# Altium PCB PCB1.PcbDoc
Units mm, origin at the board's own origin, x right, y up, seen from the top; angles counter-clockwise.
Board outline 182 x 74 mm, 2 copper layers (Top Layer, Bottom Layer), stack 1.671 mm thick; 40 components, 90 nets, 296 pads, 0 vias.
Unrouted connection lines stored in the file: 184.
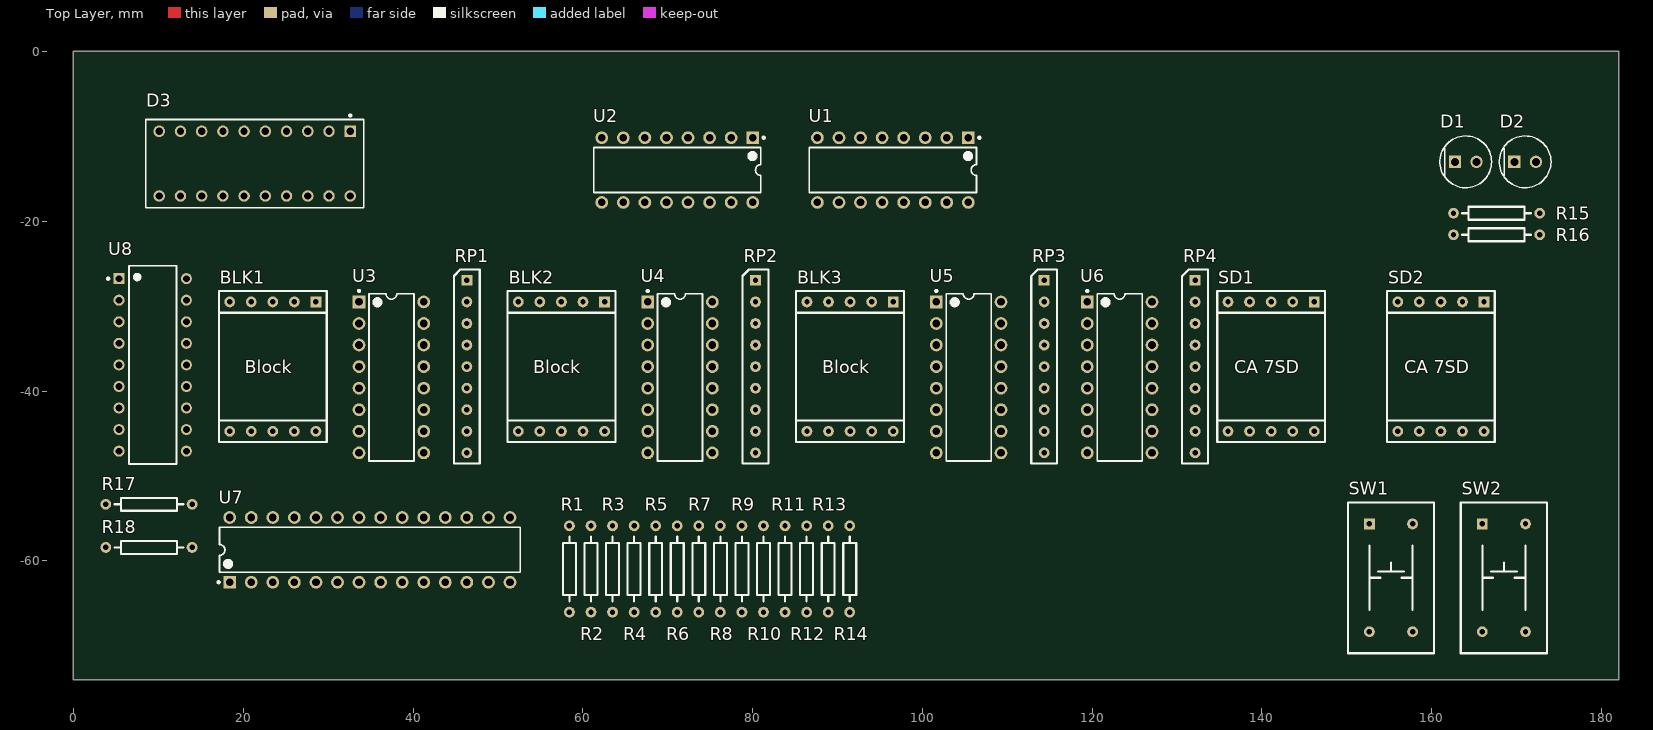
[diagram p0: Top Layer view]
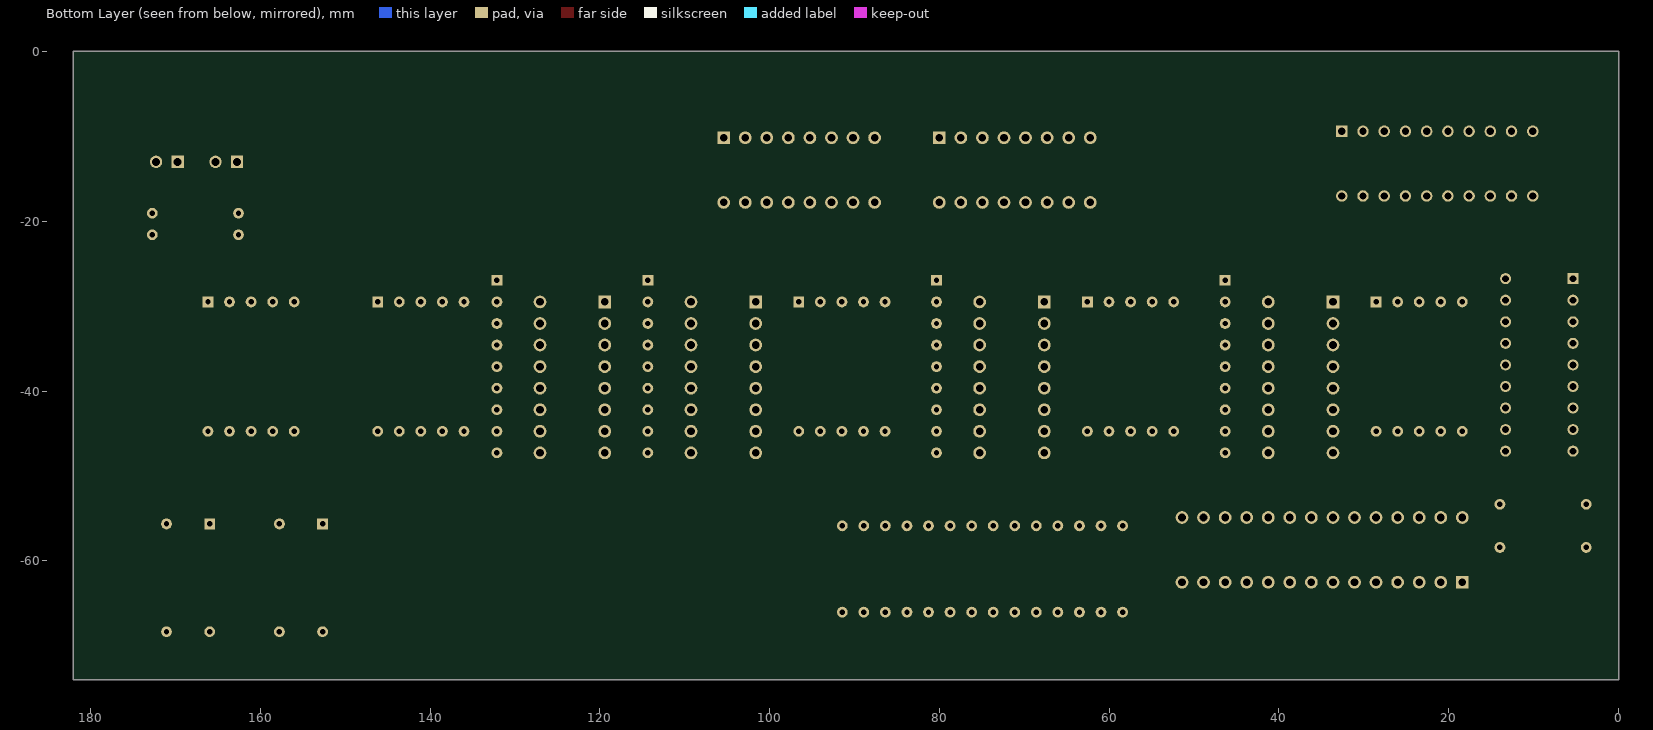
[diagram p1: Bottom Layer view, seen from below]

## Layer stack, top to bottom
Top Solder: solder mask 0.0102, Solder Resist, Dk 3.5
Top Layer: signal copper 0.0356
Dielectric 1: dielectric 1.6, FR-4, Dk 4.8
Bottom Layer: signal copper 0.0356
Bottom Solder: solder mask 0.0102, Solder Resist, Dk 3.5

## Board outline
0,0 182,0 182,-74 0,-74

## Design rules (kind name [scope] priority, off if disabled: settings)
Clearance [All] p1: gap=0.3 ignorepadtopadclearanceinfootprint=FALSE
PolygonConnect [All] p1: connectstyle=Relief reliefconductorwidth=0.254 reliefentries=4 polygonreliefangle="90 Angle" airgapwidth=0.254
RoutingVias [All] p1: holewidth=0.3 width=0.6 viastyle="Through Hole" minholewidth=0.3 minwidth=0.6 maxholewidth=0.3 maxwidth=0.6
SolderMaskExpansion [All] p1: expansion=0.102 istentingtop=FALSE
Width [All] p1: maxlimit=1 minlimit=0.3 preferedwidth=0.5
30 further rules are at their usual default settings.

## Components (designator, comment, footprint, x,y, rotation, side; value= is the part's Value field where it differs from the comment)
BLK1 "6x5 Block" Block_6x5 23.48,-29.5 r0 top
BLK2 "6x5 Block" Block_6x5 57.48,-29.5 r0 top
BLK3 "6x5 Block" Block_6x5 91.48,-29.5 r0 top
D1 "HLMP-4700" FP-HLMP-4700-MFG 164,-13 r0 top
D2 "HLMP-4700" FP-HLMP-4700-MFG 171,-13 r0 top
D3 "SSA-LXB10HW-GF/LP" FP-SSA-LXB10HW-GF-LP-MFG 21.35,-13.21 r270 top
R1 "220R" CFR_400mil 58.42,-55.88 r270 top
R2 "220R" CFR_400mil 60.96,-66.04 r90 top
R3 "220R" CFR_400mil 63.5,-55.88 r270 top
R4 "220R" CFR_400mil 66.04,-66.04 r90 top
R5 "220R" CFR_400mil 68.58,-55.88 r270 top
R6 "220R" CFR_400mil 71.12,-66.04 r90 top
R7 "220R" CFR_400mil 73.66,-55.88 r270 top
R8 "220R" CFR_400mil 76.2,-66.04 r90 top
R9 "220R" CFR_400mil 78.74,-66.04 r90 top
R10 "220R" CFR_400mil 81.28,-66.04 r90 top
R11 "220R" CFR_400mil 83.82,-66.04 r90 top
R12 "220R" CFR_400mil 86.36,-66.04 r90 top
R13 "220R" CFR_400mil 88.9,-55.88 r270 top
R14 "220R" CFR_400mil 91.44,-66.04 r90 top
R15 "220R" CFR_400mil 162.56,-19.05 r0 top
R16 "220R" CFR_400mil 162.56,-21.59 r0 top
R17 "3K3" CFR_400mil 13.97,-53.34 r180 top
R18 "2K2" CFR_400mil 13.97,-58.42 r180 top
RP1 "Resistor Pack 1k x 8" "Resistor Pack 1k x 8" 46.34,-26.96 r0 top
RP2 "Resistor Pack 1k x 8" "Resistor Pack 1k x 8" 80.34,-26.96 r0 top
RP3 "Resistor Pack 1k x 8" "Resistor Pack 1k x 8" 114.34,-26.96 r0 top
RP4 "Resistor Pack 1k x 8" "Resistor Pack 1k x 8" 132.12,-26.96 r0 top
SD1 "CA 7SD" "CA 7SD" 141.08,-29.5 r0 top
SD2 "CA 7SD" "CA 7SD" 161.08,-29.5 r0 top
SW1 "SPST (KRS-1273B-R)" "SPST KRS-1273B-R" 152.66,-55.65 r0 top
SW2 "SPST (KRS-1273B-R)" "SPST KRS-1273B-R" 165.96,-55.65 r0 top
U1 "SN74LS47N" N0016A 96.52,-13.97 r270 top
U2 "SN74LS47N" N0016A 71.12,-13.97 r270 top
U3 "SN74LS165AN" N0016A 37.45,-38.39 r0 top
U4 "SN74LS165AN" N0016A 71.45,-38.39 r0 top
U5 "SN74LS165AN" N0016A 105.45,-38.39 r0 top
U6 "SN74HC595N" N0016A 123.23,-38.39 r0 top
U7 "ATmega328P-PU" 28P3 34.91,-58.71 r90 top
U8 "LM3914N-1" FP-NFK0018A-MFG 9.331,-36.92 r0 top

## Footprints (in the part's own frame and the unit in brackets; to place one, negate y for a bottom-side part, rotate by r counter-clockwise, add the part's x,y. Pads: shape width x height; smd on the part's side, far side on the other; paste and mask are expansions set on the pad)
28P3 [mm] "28-Pin Plastic Dual In-Line Package (PDIP)"
  rect 1.5x1.5 hole 0.9: 1(-3.81,16.51)
  round 1.5 hole 0.9: 2(-3.81,13.97) 3(-3.81,11.43) 4(-3.81,8.89) 5(-3.81,6.35) 6(-3.81,3.81) 7(-3.81,1.27) 8(-3.81,-1.27) 9(-3.81,-3.81) 10(-3.81,-6.35) 11(-3.81,-8.89) 12(-3.81,-11.43) 13(-3.81,-13.97) 14(-3.81,-16.51) 15(3.81,-16.51) 16(3.81,-13.97) 17(3.81,-11.43) 18(3.81,-8.89) 19(3.81,-6.35) 20(3.81,-3.81) 21(3.81,-1.27) 22(3.81,1.27) 23(3.81,3.81) 24(3.81,6.35) 25(3.81,8.89) 26(3.81,11.43) 27(3.81,13.97) 28(3.81,16.51)
  silkscreen extent -3.93,-17.7 2.65,17.93, body extent -3.6,-17.65 3.6,17.65, height 4.58
Block_6x5 [mil]
  rect 50x50 hole 25: 1(200,0)
  round 50 hole 25: 2(100,0) 3(0,0) 4(-100,0) 5(-200,0) 6(-200,-600) 7(-100,-600) 8(0,-600) 9(100,-600) 10(200,-600)
  silkscreen extent -250,-650 250,50
"CA 7SD" [mil]
  rect 50x50 hole 25: 1(200,0)
  round 50 hole 25: 2(100,0) 3(0,0) 4(-100,0) 5(-200,0) 6(-200,-600) 7(-100,-600) 8(0,-600) 9(100,-600) 10(200,-600)
  silkscreen extent -250,-650 250,50
CFR_400mil [mil]
  round 50 hole 25: 1(0,0) 2(400,0)
  silkscreen extent 50,-30 350,30
FP-HLMP-4700-MFG [mm]
  rect 1.45x1.45 hole 0.95 paste-1000 mask+0: 1(-1.27,0)
  round 1.45 hole 0.95 paste-1000 mask+0: 2(1.27,0)
  silkscreen extent -3.05,-3.05 3.05,3.05, body extent -3.15,-3.15 3.15,3.15, height 0.25
FP-NFK0018A-MFG [mm]
  rect 1.3x1.3 hole 0.8 paste-1000 mask+0: 1(-3.969,10.16)
  round 1.3 hole 0.8 paste-1000 mask+0: 2(-3.969,7.62) 3(-3.969,5.08) 4(-3.969,2.54) 5(-3.969,0) 6(-3.969,-2.54) 7(-3.969,-5.08) 8(-3.969,-7.62) 9(-3.969,-10.16) 10(3.969,-10.16) 11(3.969,-7.62) 12(3.969,-5.08) 13(3.969,-2.54) 14(3.969,0) 15(3.969,2.54) 16(3.969,5.08) 17(3.969,7.62) 18(3.969,10.16)
  silkscreen extent -5.37,-11.68 2.8,11.68, body extent -4.72,-12.04 4.72,12.04, height 0.25
FP-SSA-LXB10HW-GF-LP-MFG [mm]
  rect 1.35x1.35 hole 0.85 paste-1000 mask+0: 1(-3.81,11.25)
  round 1.35 hole 0.85 paste-1000 mask+0: 2(-3.81,8.75) 3(-3.81,6.25) 4(-3.81,3.75) 5(-3.81,1.25) 6(-3.81,-1.25) 7(-3.81,-3.75) 8(-3.81,-6.25) 9(-3.81,-8.75) 10(-3.81,-11.25) 11(3.81,-11.25) 12(3.81,-8.75) 13(3.81,-6.25) 14(3.81,-3.75) 15(3.81,-1.25) 16(3.81,1.25) 17(3.81,3.75) 18(3.81,6.25) 19(3.81,8.75) 20(3.81,11.25)
  silkscreen extent -5.8,-12.82 5.21,12.82, body extent -5.31,-12.93 5.31,12.93, height 0.25
N0016A [mm] "DIP, 16-Leads, Body 19.7x6.6mm, Pitch 2.54mm"
  rect 1.5x1.5 hole 0.9: 1(-3.81,8.89)
  round 1.5 hole 0.9: 2(-3.81,6.35) 3(-3.81,3.81) 4(-3.81,1.27) 5(-3.81,-1.27) 6(-3.81,-3.81) 7(-3.81,-6.35) 8(-3.81,-8.89) 9(3.81,-8.89) 10(3.81,-6.35) 11(3.81,-3.81) 12(3.81,-1.27) 13(3.81,1.27) 14(3.81,3.81) 15(3.81,6.35) 16(3.81,8.89)
  silkscreen extent -3.93,-9.85 2.65,10.32, body extent -3.95,-9.85 3.95,9.85, height 5.08
"Resistor Pack 1k x 8" [mil]
  rect 50x50 hole 25: 1(0,0)
  round 50 hole 25: 2(0,-100) 3(0,-200) 4(0,-300) 5(0,-400) 6(0,-500) 7(0,-600) 8(0,-700) 9(0,-800)
  silkscreen extent -60,-850 60,50
"SPST KRS-1273B-R" [mm]
  rect 1.27x1.27 hole 0.635: 1(0,0)
  round 1.27 hole 0.635: 2(0,-12.7) 3(5.08,-12.7) 4(5.08,0)
  silkscreen extent -2.54,-15.24 7.62,2.54

## Part data
BLK1 BLK2 BLK3: library part Block_6x5
D1 D2: library part CMP-18399-000008-1, "LED RED DIFFUSED T-1 3/4 T/H", Colour=Red, Forward Current=2mA, Forward Voltage=1.7V, Manufacturer=Broadcom, Power Dissipation=14mW, Reverse Voltage=5V, Temperature="-40°C to +100°C", Temperature Range High=+100°C, Temperature Range Low=-40°C, Automotive=No, Category=Diode, ComponentLink2Description=Datasheet, ComponentLink2URL=https://docs.broadcom.com/docs/AV02-1557EN, Device Class L1=Optoelectronics, Device Class L2=LEDs, Device Class L3=unset, Digikey Description="LED RED DIFFUSED T-1 3/4 T/H", Lead Free=Yes, Led Orientation=Straight, Luminous Intensity=2.3mcd, Manufacturer Part Number=HLMP-4700, Mouser Description="LED; Red; 2.3mcd; 0.24In.Dia.; T-1-3/4; 500mA; 1.7V; 635nm; 50deg; 5V; 24mW; -55degC;", Octopart=https://octopart.com/hlmp-4700-broadcom-71130526, Package=HLMP-4700, Peak Emmision Wavelength=635nm, RoHS=TRUE, Viewing Angle=50°, Wavelength=626nm
D3: library part CMP-57188-000001-1, "LED ARRAY 10X25MM 10SEG RED DIFF", Forward Current=20mA, Forward Voltage=2V, Manufacturer=lumex, Power Dissipation=105mW, Reverse Voltage=5V, Temperature="-40°C to +85°C", Temperature Range High=+85°C, Temperature Range Low=-40°C, Automotive=No, Category=Diode, ComponentLink2Description=Datasheet, ComponentLink2URL=https://www.lumex.com/spec/SSA-LXB10HW-GF-LP.pdf, Device Class L1=Optoelectronics, Device Class L2=Displays, Device Class L3="LED Displays", Digikey Description="LED ARRAY 10X25MM 10SEG RED DIFF", Display Type="Bar Graph", Height=7.05mm, Lead Free=Yes, Luminous Intensity=500mcd, Manufacturer Part Number=SSA-LXB10HW-GF/LP, Mouser Description="LED Bars and Arrays 10 Segment Red", Octopart=https://octopart.com/ssa-lxb10hw-gf%2Flp-lumex-548235, Package=SSA-LXB10HW-GF/LP, RoHS=TRUE, Test Current=20mA, Viewing Angle=160°
R1 R2 R3 R4 R5 R6 R7 R8 R9 R10 R11 R12 R13 R14 R15 R16: library part CFR-25JB-52-220R, "General Type Carbon Film Resistor 220Ohm 1/4W 5% Axial Bulk", Case/Package=Axial, Manufacturer=Yageo, Max Operating Temperature=155°C, Max Power Dissipation=250mW, Min Operating Temperature=-55°C, Package Quantity=200, Resistor Type="Carbon Film", Supplier Part Number 1=220QBK-ND, Temperature Coefficient=500ppm/°C, Tolerance=5%, Category="Through-Hole Resistors", ComponentLink1Description=http://www.mouser.com/ds/2/447/Yageo%20LR_CFR_2013-540723.pdf?src-supplier=Mouser, ComponentLink1URL=http://www.mouser.com/ds/2/447/Yageo%20LR_CFR_2013-540723.pdf?src-supplier=Mouser, ComponentLink2Description=http://www.yageo.com/NewPortal/yageodocoutput?fileName=/pdf/throughhole/Yageo_LR_CFR_2013.pdf&src-supplier=Digi-Key, ComponentLink2URL=http://www.yageo.com/NewPortal/yageodocoutput?fileName=/pdf/throughhole/Yageo_LR_CFR_2013.pdf&src-supplier=Digi-Key, Length=0.248inch, Manufacturer Part Number=CFR-25JB-52-220R, Number of Terminations=2, Packaging=Bulk, Pricing 1="1=0.10000, 10=0.06800, 25=0.04680, 50=0.03640, 100=0.02600, 250=0.02028, 500=0.01612, 1000=0.01144, 5000=0.00884 (USD)", Resistance=220R, RoHS=Yes, RoHS Compliant=Yes, Series="Carbon Film", Stock 1=1583, Supplier 1=Digi-Key
R17: library part CFR-25JB-52-3K3, "General Type Carbon Film Resistor 3.3kOhm 1/4W 5% Axial Bulk", Case/Package=Axial, Manufacturer=Yageo, Manufacturer Part Number=CFR-25JB-52-220R, Max Operating Temperature=155°C, Max Power Dissipation=250mW, Min Operating Temperature=-55°C, Package Quantity=200, Resistance=220R, Resistor Type="Carbon Film", Supplier Part Number 1=220QBK-ND, Temperature Coefficient=500ppm/°C, Tolerance=5%, Category="Through-Hole Resistors", ComponentLink1Description=http://www.mouser.com/ds/2/447/Yageo%20LR_CFR_2013-540723.pdf?src-supplier=Mouser, ComponentLink1URL=http://www.mouser.com/ds/2/447/Yageo%20LR_CFR_2013-540723.pdf?src-supplier=Mouser, ComponentLink2Description=http://www.yageo.com/NewPortal/yageodocoutput?fileName=/pdf/throughhole/Yageo_LR_CFR_2013.pdf&src-supplier=Digi-Key, ComponentLink2URL=http://www.yageo.com/NewPortal/yageodocoutput?fileName=/pdf/throughhole/Yageo_LR_CFR_2013.pdf&src-supplier=Digi-Key, Length=0.248inch, Number of Terminations=2, Packaging=Bulk, Pricing 1="1=0.10000, 10=0.06800, 25=0.04680, 50=0.03640, 100=0.02600, 250=0.02028, 500=0.01612, 1000=0.01144, 5000=0.00884 (USD)", RoHS=Yes, RoHS Compliant=Yes, Series="Carbon Film", Stock 1=1583, Supplier 1=Digi-Key
R18: library part CFR-25JB-52-2K2, "General Type Carbon Film Resistor 2.2kOhm 1/4W 5% Axial Bulk", Case/Package=Axial, Manufacturer=Yageo, Manufacturer Part Number=CFR-25JB-52-220R, Max Operating Temperature=155°C, Max Power Dissipation=250mW, Min Operating Temperature=-55°C, Package Quantity=200, Resistance=220R, Resistor Type="Carbon Film", Supplier Part Number 1=220QBK-ND, Temperature Coefficient=500ppm/°C, Tolerance=5%, Category="Through-Hole Resistors", ComponentLink1Description=http://www.mouser.com/ds/2/447/Yageo%20LR_CFR_2013-540723.pdf?src-supplier=Mouser, ComponentLink1URL=http://www.mouser.com/ds/2/447/Yageo%20LR_CFR_2013-540723.pdf?src-supplier=Mouser, ComponentLink2Description=http://www.yageo.com/NewPortal/yageodocoutput?fileName=/pdf/throughhole/Yageo_LR_CFR_2013.pdf&src-supplier=Digi-Key, ComponentLink2URL=http://www.yageo.com/NewPortal/yageodocoutput?fileName=/pdf/throughhole/Yageo_LR_CFR_2013.pdf&src-supplier=Digi-Key, Length=0.248inch, Number of Terminations=2, Packaging=Bulk, Pricing 1="1=0.10000, 10=0.06800, 25=0.04680, 50=0.03640, 100=0.02600, 250=0.02028, 500=0.01612, 1000=0.01144, 5000=0.00884 (USD)", RoHS=Yes, RoHS Compliant=Yes, Series="Carbon Film", Stock 1=1583, Supplier 1=Digi-Key
RP1 RP2 RP3 RP4: library part 4309R-101-102LF, "Res Thick Film NET 1K Ohm 2% 1.13W ±100ppm/°C BUS Molded 9-Pin SIP Pin Thru-Hole", Case/Package=SIP, Manufacturer=Bourns, Max Operating Temperature=125°C, Min Operating Temperature=-55°C, Number of Resistors=8, Package Quantity=22, Power Per Element=200mW, Power Rating=1.13W, Resistance=1kR, Resistance Tolerance=2%, Supplier Part Number 1=32K9075, Temperature Coefficient=100ppm/°C, Voltage Rating=100V, Category="Resistor Arrays", Circuit Type=Bussed, ComponentLink1Description=https://datasheet.ciiva.com/1132/1639105-1132861.pdf?src-supplier=Element14, ComponentLink1URL=https://datasheet.ciiva.com/1132/1639105-1132861.pdf?src-supplier=Element14, ComponentLink2Description=https://datasheet.ciiva.com/3264/4300r-3264093.pdf?src-supplier=Avnet, ComponentLink2URL=https://datasheet.ciiva.com/3264/4300r-3264093.pdf?src-supplier=Avnet, ComponentLink3Description=https://datasheet.ciiva.com/6494/4300r-6494366.pdf?src-supplier=Digi-Key, ComponentLink3URL=https://datasheet.ciiva.com/6494/4300r-6494366.pdf?src-supplier=Digi-Key, ComponentLink4Description=https://datasheet.ciiva.com/14583/70154247-14583487.pdf?src-supplier=Allied+Electronics, ComponentLink4URL=https://datasheet.ciiva.com/14583/70154247-14583487.pdf?src-supplier=Allied+Electronics, Depth=2.16mm, Height=0.195inch, Lead Pitch=2.54mm, Length=0.884inch, Manufacturer Part Number=4309R-101-102LF, Military Standard=Not, Mount="Through Hole", Number of Elements=8, Number of Pins=9, Number of Terminals/Pins=9, Packaging=Rail/Tube, Pricing 1="1=1.42000 (USD)", Radiation Hardening=No, Reach SVHC Compliant=Yes, RoHS=Yes, RoHS Compliant=Yes, Series=4300R, Stock 1=21, Supplier 1=Avnet, Technology="THICK FILM", Terminal Pitch=2.54mm, Termination=SIP, Tolerance=2%, Voltage Rating (DC)=100V, Width=0.085inch
SD1 SD2: library part LDS-A5642RI, "Single Digit Seven Segment Green 0.56\" Common Anode Through Hole LED Display", Case/Package=DIP, Color=Green, Forward Current=10mA, Forward Voltage=2.2V, Manufacturer=Lumex, Max Operating Temperature=85°C, Max Power Dissipation=105mW, Min Operating Temperature=-40°C, Package Quantity=40, Supplier Part Number 1=8628562, Category="LED Displays", ComponentLink1Description=https://datasheet.ciiva.com/16294/lds-a5642ri-16294404.pdf?src-supplier=Future+Electronics, ComponentLink1URL=https://datasheet.ciiva.com/16294/lds-a5642ri-16294404.pdf?src-supplier=Future+Electronics, ComponentLink2Description=https://datasheet.ciiva.com/4421/lds-a5642ri-33718-4421941.pdf?src-supplier=Mouser, ComponentLink2URL=https://datasheet.ciiva.com/4421/lds-a5642ri-33718-4421941.pdf?src-supplier=Mouser, ComponentLink3Description=https://datasheet.ciiva.com/30079/lds-a5642ri-30079851.pdf?src-supplier=Onlinecomponents.com, ComponentLink3URL=https://datasheet.ciiva.com/30079/lds-a5642ri-30079851.pdf?src-supplier=Onlinecomponents.com, Display Type=Segment, Element Configuration="Common Anode", Height=0.32inch, Illumination Color=Green, Lead Free="Lead Free", Length=0.67inch, Luminous Intensity=3.9mcd, Manufacturer Part Number=LDS-A5642RI, Mount="Through Hole", Number of Contacts=10, Number of LEDs=8, Number of Pins=10, Operating Supply Voltage=2.2V, Packaging=Bulk, Power Consumption=105mW, Pricing 1="1=0.91500, 50=0.88000, 200=0.84000, 750=0.80500, 2500=0.74000 (USD)", RoHS=Yes, RoHS Compliant=Yes, Supplier 1="Future Electronics", Test Current=10mA, Viewing Area (height)=14.2mm, Wavelength=565nm, Width=0.5inch
SW1 SW2: library part KRS-1273B-R, "Switch Push Button Tactile Off Momentary (On) Single Pole Single Throw Cap: 155389 155409", Manufacturer="Jameco Valuepro", Supplier Part Number 1=155380, Category=Uncategorized, ComponentLink1Description=https://datasheet.ciiva.com/19453/155380-19453382.pdf?src-supplier=Jameco, ComponentLink1URL=https://datasheet.ciiva.com/19453/155380-19453382.pdf?src-supplier=Jameco, Manufacturer Part Number=KRS-1273B-R, Number of Pins=4, Orientation=Straight, Pricing 1="1=0.45000, 10=0.39000, 100=0.35000, 250=0.29000 (USD)", RoHS=No, Stock 1=2143, Supplier 1=Jameco, Termination="PC Pins", Throw Configuration=SPST
U1 U2: library part CMP-0388-00303-2, "BCD-to-7-Segment Decoder / Driver, 4.75 to 5.25 V, 0 to 70 degC, 16-pin DIP (N16), Pb-Free (RoHS)", Manufacturer="Texas Instruments", Rating=Catalog, Code_JEDEC=MS-001, ComponentLink1Description="Manufacturer URL", ComponentLink1URL=http://www.ti.com/, ComponentLink2Description=Datasheet, ComponentLink2URL=http://www.ti.com/general/docs/lit/getliterature.tsp?genericPartNumber=SN74LS47&fileType=pdf, ComponentLink3Description="Package Specification", ComponentLink3URL=http://www.ti.com/litv/pdf/mpdi002c, DatasheetVersion=SDLS111, Eco-Plan="Pb-Free (RoHS)", Mounting Technology="Through Hole", PackageDescription="16-Pin Plastic In-Line, Body 19.305 x 6.35 mm, Pitch 2.54 mm", PackageReference=N0016A, PackageVersion=4040049/E, PartNumber=SN74LS47N, SubFamily="Discrete Segment LED Driver", Vin(Max)(V)=5.25, Vin(Min)(V)=4.75
U3 U4 U5: library part CMP-0780-00134-3, "Serial-out shift registers, N0016A, TUBE", F @ Nom Voltage(Max)(Mhz)=35, Generic Part Number=SN74LS165A, ICC @ Nom Voltage(Max)(mA)=30, Manufacturer="Texas Instruments", Operating Temperature Range(C)="0 to 70", Rating=Catalog, tpd @ Nom Voltage(Max)(ns)=25, Voltage(Nom)(V)=5, 3-State Output=No, Bits=8, Code_JEDEC=MS-001, DatasheetVersion=SDLS062D, Input Type=TTL, Output Drive (IOL/IOH)(Max)(mA)=8/-0.4, Output Type=TTL, PackageReference=N0016A, PackageVersion=http://www.ti.com/lit/ml/mpdi002c/mpdi002c.pdf, Technology Family=LS, VCC(Max)(V)=5.25, VCC(Min)(V)=4.75
U6: library part CMP-0780-00137-3, "8-Bit Shift Registers With 3-State Output Registers, N0016A, TUBE", F @ Nom Voltage(Max)(Mhz)=28, Generic Part Number=SN74HC595, ICC @ Nom Voltage(Max)(mA)=0.08, Manufacturer="Texas Instruments", Operating Temperature Range(C)="-40 to 85", Rating=Military, tpd @ Nom Voltage(Max)(ns)=34, Voltage(Nom)(V)=6, 3-State Output=Yes, Bits=8, Code_JEDEC=MS-001, DatasheetVersion=SCLS041H, Input Type=CMOS, Output Drive (IOL/IOH)(Max)(mA)=7.8/-7.8, Output Type=CMOS, PackageReference=N0016A, PackageVersion=http://www.ti.com/lit/ml/mpdi002c/mpdi002c.pdf, Technology Family=HC, VCC(Max)(V)=6, VCC(Min)(V)=2
U7: library part CMP-0095-00013-2, "8-bit AVR Microcontroller, 32KB Flash, 1KB EEPROM, 2KB SRAM, 28-pin PDIP, Industrial Grade (-40°C to 85°C)", ComponentLink1Description="Manufacturer URL", ComponentLink1URL=http://www.atmel.com/, ComponentLink2Description="ATmega48A/48PA/88A/88PA/168A/168PA/328/328P Datasheet", ComponentLink2URL=http://www.atmel.com/dyn/resources/prod_documents/8271.pdf, ComponentLink3Description="ATmega48A/48PA/88A/88PA/168A/168PA/328/328P Summary", ComponentLink3URL=http://www.atmel.com/dyn/resources/prod_documents/8271S.pdf, DatasheetVersion="revD, May-2011", PackageDescription="28-lead (0.300\"/7.62mm Wide) Plastic Dual Inline Package (PDIP)", PackageReference=28P3, PackageVersion="revB, Sep-2001", RevisionNote="DatasheetVersion updated. URLs added."
U8: library part CMP-0058-00006-4, "IC DRVR DOT/BAR DISPLAY 18DIP", Case/Package=DIP, Max Input Voltage=12V, Max Operating Temperature=70°C, Max Output Voltage=1.34V, Max Power Dissipation=1.365W, Max Supply Current=9.2kA, Max Supply Voltage=25V, Min Input Voltage=1.2V, Min Operating Temperature=0°C, Nominal Supply Current=9.2mA, Operating Supply Current=6.1mA, Output Current=30mA, Output Voltage=1.28V, Package Quantity=20, Height=3.3mm, Lead Free="Contains Lead", Length=22.86mm, Mount="Through Hole", Number of Channels=10, Number of Outputs=10, Number of Pins=18, Number of Segments=10, Packaging=Rail/Tube, Power Dissipation=1.365W, Radiation Hardening=No, REACH SVHC="No SVHC", RoHS Compliant=No, Series=-, Supply Current=9.2mA, Termination="Through Hole", Width=6.35mm

## Nets (pads, with @x,y where several pads share a name; then routed paths per layer and width w, separated by ;. In a path a pad name is that pad's centre, name@x,y a point inside that pad or via, vN(x,y) a via of type N, cw(c..) or ccw(c..) an arc to the next point about the centre after c; other vN are vias at no path point)
GND: BLK1.10 BLK2.10 BLK3.10 R15.2 R16.2 R17.2 RP1.1 RP2.1 RP3.1 RP4.1 SW1.3 SW2.3 U1.8 U2.8 U3.8 U3.10 U4.8 U4.10 U5.8 U5.10 U6.8 U6.13 U7.8 U7.22 U8.2 U8.4
IO6: U1.4 U2.4
IO11: U3.7 U7.17
NetBLK1_1: BLK1.1 RP1.6 U3.3 | length 0.1
  Top Layer w0.5: BLK1.1 BLK1.1@28.6,-29.54
NetBLK1_2: BLK1.2 RP1.7 U3.4
NetBLK1_3: BLK1.3 RP1.8 U3.5
NetBLK1_4: BLK1.4 RP1.9 U3.6
NetBLK1_6: BLK1.6 RP1.5 U3.14
NetBLK1_7: BLK1.7 RP1.4 U3.13
NetBLK1_8: BLK1.8 RP1.3 U3.12
NetBLK1_9: BLK1.9 RP1.2 U3.11
NetBLK2_1: BLK2.1 RP2.6 U4.3
NetBLK2_2: BLK2.2 RP2.7 U4.4
NetBLK2_3: BLK2.3 RP2.8 U4.5
NetBLK2_4: BLK2.4 RP2.9 U4.6
NetBLK2_6: BLK2.6 RP2.5 U4.14
NetBLK2_7: BLK2.7 RP2.4 U4.13
NetBLK2_8: BLK2.8 RP2.3 U4.12
NetBLK2_9: BLK2.9 RP2.2 U4.11
NetBLK3_1: BLK3.1 RP3.6 U5.3
NetBLK3_2: BLK3.2 RP3.7 U5.4
NetBLK3_3: BLK3.3 RP3.8 U5.5
NetBLK3_4: BLK3.4 RP3.9 U5.6
NetBLK3_6: BLK3.6 RP3.5 U5.14
NetBLK3_7: BLK3.7 RP3.4 U5.13
NetBLK3_8: BLK3.8 RP3.3 U5.12
NetBLK3_9: BLK3.9 RP3.2 U5.11
NetD1_1: D1.1 R15.1
NetD1_2: D1.2 U7.24
NetD2_1: D2.1 R16.1
NetD2_2: D2.2 U7.25
NetD3_11: D3.11 U8.1
NetD3_12: D3.12 U8.18
NetD3_13: D3.13 U8.17
NetD3_14: D3.14 U8.16
NetD3_15: D3.15 U8.15
NetD3_16: D3.16 U8.14
NetD3_17: D3.17 U8.13
NetD3_18: D3.18 U8.12
NetD3_19: D3.19 U8.11
NetD3_20: D3.20 U8.10
NetR1_1: R1.1 U1.12
NetR1_2: R1.2 SD1.1
NetR2_1: R2.1 SD2.5
NetR2_2: R2.2 U2.14
NetR3_1: R3.1 U1.13
NetR3_2: R3.2 SD1.2
NetR4_1: R4.1 SD2.4
NetR4_2: R4.2 U2.15
NetR5_1: R5.1 U1.15
NetR5_2: R5.2 SD1.4
NetR6_1: R6.1 SD2.2
NetR6_2: R6.2 U2.13
NetR7_1: R7.1 U1.14
NetR7_2: R7.2 SD1.5
NetR8_1: R8.1 SD2.1
NetR8_2: R8.2 U2.12
NetR9_1: R9.1 U1.9
NetR9_2: R9.2 SD1.6
NetR10_1: R10.1 SD2.9
NetR10_2: R10.2 U2.11
NetR11_1: R11.1 U1.11
NetR11_2: R11.2 SD1.9
NetR12_1: R12.1 SD2.6
NetR12_2: R12.2 U2.9
NetR13_1: R13.1 U1.10
NetR13_2: R13.2 SD1.7
NetR14_1: R14.1 SD2.7
NetR14_2: R14.2 U2.10
NetR17_1: R17.1 R18.1 U8.8
NetR18_2: R18.2 U8.6 U8.7
NetRP4_2: RP4.2 U2.7 U6.15
NetRP4_3: RP4.3 U2.1 U6.1
NetRP4_4: RP4.4 U2.2 U6.2
NetRP4_5: RP4.5 U2.6 U6.3
NetRP4_6: RP4.6 U1.7 U6.4
NetRP4_7: RP4.7 U1.1 U6.5
NetRP4_8: RP4.8 U1.2 U6.6
NetRP4_9: RP4.9 U1.6 U6.7
NetSW1_1: SW1.1 U7.4
NetSW2_1: SW2.1 U7.5
NetU3_1: U3.1 U4.1 U5.1 U7.18
NetU3_2: U3.2 U4.2 U5.2 U6.11 U7.6
NetU3_15: U3.15 U4.15 U5.15 U7.16
NetU4_7: U4.7 U7.13
NetU5_7: U5.7 U7.15
NetU6_12: U6.12 U7.14
NetU6_14: U6.14 U7.11
NetU7_19: U7.19 U8.5
VCC: BLK1.5 BLK2.5 BLK3.5 D3.1 D3.2 D3.3 D3.4 D3.5 D3.6 D3.7 D3.8 D3.9 D3.10 SD1.3 SD1.8 SD2.3 SD2.8 U1.3 U1.5 U1.16 U2.3 U2.5 U2.16 U3.16 U4.16 U5.16 U6.10 U6.16 U7.20 U8.3 U8.9
pads on no net: SD1.10 SD2.10 SW1.2 SW1.4 SW2.2 SW2.4 U3.9 U4.9 U5.9 U6.9 U7.1 U7.2 U7.3 U7.7 U7.9 U7.10 U7.12 U7.21 U7.23 U7.26 U7.27 U7.28

## Text inside footprints (layer, text, board x,y; h text height)
BLK1: Top Overlay "Block" at 20.179,-37.882 h1.52
BLK2: Top Overlay "Block" at 54.179,-37.882 h1.52
BLK3: Top Overlay "Block" at 88.179,-37.882 h1.52